# Altium PCB SiLPA.PcbDoc (part 2 of 10)
Units mm, origin at the board's own origin, x right, y up, seen from the top; angles counter-clockwise.
Board outline 222.36 x 100 mm, 4 copper layers (L1, P2, L3, L4), stack 1.598 mm thick; 583 components, 330 nets, 1692 pads, 1781 vias.
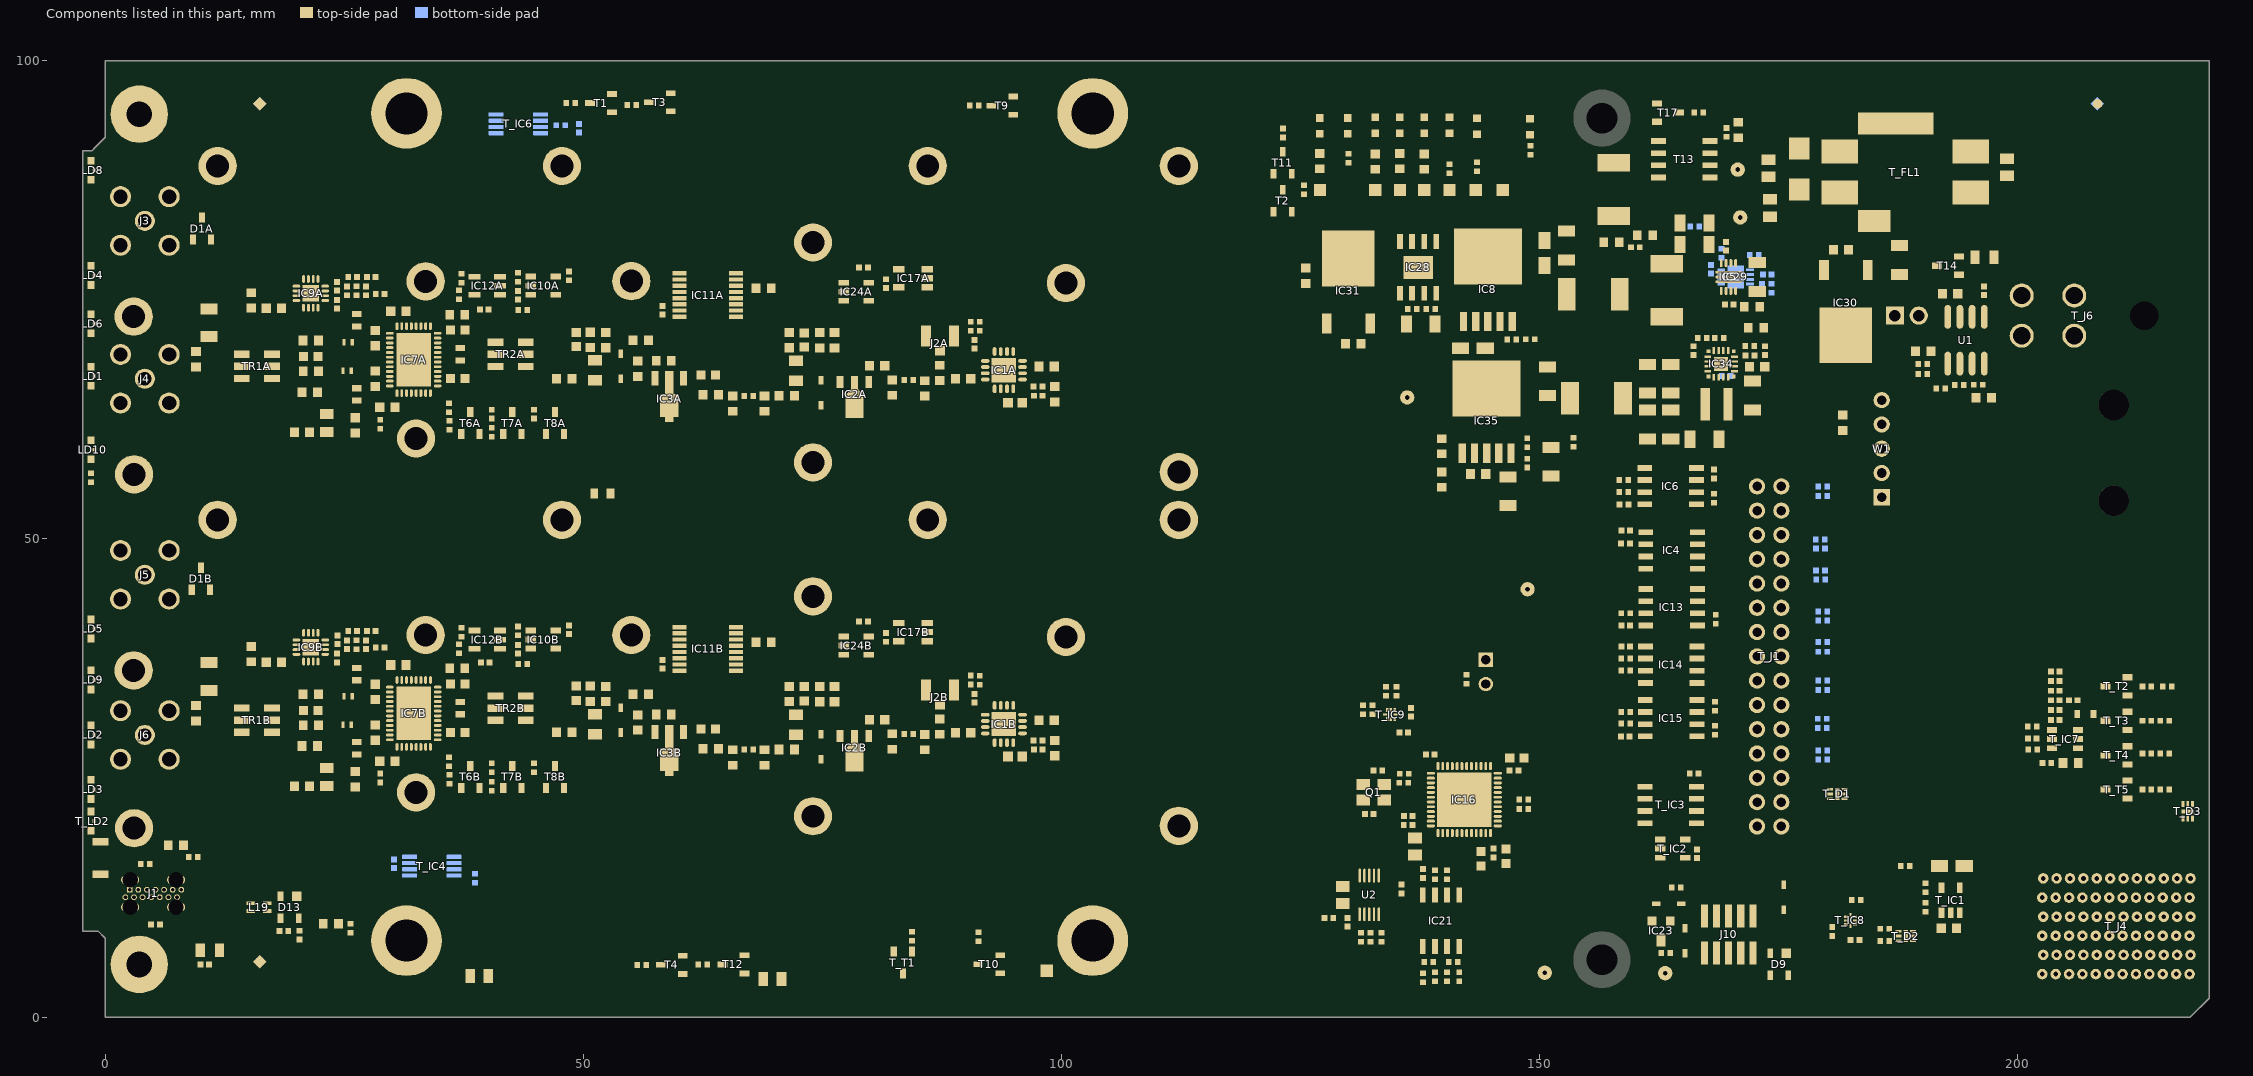
[diagram p4: the components of this part, seen from the top]

## Components (designator, comment, footprint, x,y, rotation, side; value= is the part's Value field where it differs from the comment) (continued)
LD3 "Green" LED_AVAGO_HSME-C120 -1.5,23.8 r90 top locked
LD4 "Green" LED_AVAGO_HSME-C120 -1.5,77.559 r90 top locked
LD5 "Green" LED_AVAGO_HSME-C120 -1.5,40.582 r90 top locked
LD6 "Green" LED_AVAGO_HSME-C120 -1.5,72.5 r90 top locked
LD8 "Red" LED_AVAGO_HSMC-C120 -1.5,88.55 r90 top locked
LD9 "Green" LED_AVAGO_HSME-C120 -1.5,35.25 r90 top locked
LD10 "Red" LED_AVAGO_HSMC-C120 -1.5,59.325 r90 top locked
LD11 "Green" LED_KINGBRIGHT_KPH-1608CGCKr 140.55,93.25 r270 top
LD12 "Green" LED_KINGBRIGHT_KPH-1608CGCKr 137.909,93.25 r270 top
LD13 "Green" LED_KINGBRIGHT_KPH-1608CGCKr 143.432,93.15 r270 top
LD14 "Green" LED_KINGBRIGHT_KPH-1608CGCKr 132.8,93.25 r270 top
LD16 "Green" LED_KINGBRIGHT_KPH-1608CGCKr 127,93.191 r270 top
LD18 "Green" LED_KINGBRIGHT_KPH-1608CGCKr 135.369,93.25 r270 top
Q1 "24MHz" XTAL_EPSON_TSX-3225 132.629,23.5 r270 top
R1A "100" RESC1005X40N 90.5,72.25 r270 top (schematic designator R1)
R1B "100" RESC1005X40N 90.5,35.25 r270 top (schematic designator R1)
R2A "100" RESC1005X40N 91.44,72.24 r270 top (schematic designator R2)
R2B "100" RESC1005X40N 91.44,35.24 r270 top (schematic designator R2)
R3A "1k" RESC1608X55N 58.4,68.64 r180 top (schematic designator R3)
R3B "1k" RESC1608X55N 58.4,31.64 r180 top (schematic designator R3)
R4A "Undefined" RESC1608X55N 87.26,67.37 r270 top (schematic designator R4)
R4B "Undefined" RESC1608X55N 87.26,30.37 r270 top (schematic designator R4)
R5A "0" RESC1005X40N 67.29,64.96 r180 top (schematic designator R5)
R5B "0" RESC1005X40N 67.29,27.96 r180 top (schematic designator R5)
R6A "75" RESC1005X40N 84.01,66.61 r180 top (schematic designator R6)
R6B "75" RESC1005X40N 84.01,29.61 r180 top (schematic designator R6)
R7A "100" RESC1608X55N 85.67,65.75 r90 top (schematic designator R7)
R7B "100" RESC1608X55N 85.67,28.75 r90 top (schematic designator R7)
R8A "100" RESC1608X55N 82.3,65.82 r90 top (schematic designator R8)
R8B "100" RESC1608X55N 82.3,28.82 r90 top (schematic designator R8)
R9A "Undefined" RESC1608X55N 68.93,64.14 r90 top (schematic designator R9)
R9B "Undefined" RESC1608X55N 68.93,27.14 r90 top (schematic designator R9)
R10A "Undefined" RESC1608X55N 65.61,64.14 r90 top (schematic designator R10)
R10B "Undefined" RESC1608X55N 65.61,27.14 r90 top (schematic designator R10)
R11 "330" RESC1005X40N 48.69,95.6 r0 top
R12 "330" RESC1005X40N 55.065,95.36 r0 top
R13 "330" RESC1005X40N 9.2,16.754 r0 top
R14 "330" RESC1005X40N 56.106,5.468 r0 top
R15 "330" RESC1005X40N 62.479,5.508 r0 top
R16 "100" RESC1005X40N 158.959,49.54 r0 top
R17 "47k" RESC1608X55N 172.178,74.3 r0 top
R18A "910" RESC1608X55N 36.806,73.461 r0 top (schematic designator R18)
R18B "910" RESC1608X55N 36.806,36.461 r0 top (schematic designator R18)
R19A "18k" RESC1005X40N 28.75,62 r270 top (schematic designator R19)
R19B "18k" RESC1005X40N 28.75,25 r270 top (schematic designator R19)
R20 "10k" RESC1005X40N 125.361,86.5 r90 top
R21A "Undefined" RESC1608X55N 21.49,67.521 r0 top (schematic designator R21)
R21B "Undefined" RESC1608X55N 21.49,30.521 r0 top (schematic designator R21)
R22 "10k" RESC1005X40N 84.35,8.46 r90 top
R23A "1k" RESC1005X40N 43.16,77.375 r90 top (schematic designator R23)
R23B "1k" RESC1005X40N 43.16,40.375 r90 top (schematic designator R23)
R24A "0" RESC1005X40N 25.852,77.375 r0 top (schematic designator R24)
R24B "0" RESC1005X40N 25.852,40.375 r0 top (schematic designator R24)
R25A "0" RESC1608X55N 68.84,76.2 r0 top (schematic designator R25)
R25B "0" RESC1608X55N 68.84,39.2 r0 top (schematic designator R25)
R26 "100" RESC1005X40N 138.376,5.779 r0 top
R27A "82" RESC1608X55N 15.28,74.95 r270 top (schematic designator R27)
R27B "82" RESC1608X55N 15.28,37.95 r270 top (schematic designator R27)
R28 "56k" RESC1608X55N 161,81.75 r0 top
R29A "2k4" RESC1005X40N 35.946,63.709 r270 top (schematic designator R29)
R29B "2k4" RESC1005X40N 35.946,26.709 r270 top (schematic designator R29)
R30 "8k2" RESC1608X55N 157.5,81 r0 top
R31A "3R9" RESC1005X40N 26.275,75.93 r270 top (schematic designator R31)
R31B "3R9" RESC1005X40N 26.275,38.93 r270 top (schematic designator R31)
R32A "10k" RESC1005X40N 37,75.53 r90 top (schematic designator R32)
R32B "10k" RESC1005X40N 37,38.53 r90 top (schematic designator R32)
R33A "20k" RESC1005X40N 37.25,77.25 r270 top (schematic designator R33)
R33B "20k" RESC1005X40N 37.25,40.25 r270 top (schematic designator R33)
R34 "100" RESC1005X40N 168.193,54.255 r90 top
R35 "100" RESC1005X40N 158.784,54.885 r0 top
R36 "100" RESC1005X40N 168.213,56.788 r90 top
R37 "100" RESC1005X40N 158.784,56.155 r0 top
R38 "100" RESC1005X40N 168.395,41.601 r90 top
R39 "100" RESC1005X40N 158.978,42.227 r0 top
R40 "27k" RESC1005X40N 166.185,82.69 r180 bottom
R41 "0" RESC1005X40N 169.019,79.89 r270 bottom
R42 "100" RESC1005X40N 158.967,37.501 r0 top
R43 "100" RESC1005X40N 158.967,36.231 r0 top
R44 "100" RESC1005X40N 168.313,29.992 r90 top
R45 "100" RESC1005X40N 159,30.696 r0 top
R46 "100" RESC1005X40N 168.313,32.499 r90 top
R47 "100" RESC1005X40N 159,31.899 r0 top
R48 "3k3" RESC1005X40N 172.429,79.68 r180 bottom
R49 "75k" RESC1005X40N 174.229,76.19 r270 bottom
R50 "15k" RESC1005X40N 173.229,76.19 r90 bottom
R51 "100k" RESC1608X55N 170.75,92.75 r270 top
R52A "82" RESC1005X40N 43.63,73.92 r180 top (schematic designator R52)
R52B "82" RESC1005X40N 43.656,36.92 r180 top (schematic designator R52)
R53 "0" RESC1005X40N 131.529,32.125 r270 top
R55 "330" RESC1005X40N -1.475,56.375 r90 top
R56 "100k" RESC1005X40N 190.025,68.275 r180 top
R57 "33k" RESC1005X40N 193.85,66.075 r180 top
R58 "22k" RESC1005X40N 190.03,67.25 r0 top
R59A "1k2" RESC1005X40N 40.41,63.06 r270 top (schematic designator R59)
R59B "1k2" RESC1005X40N 40.41,26.06 r270 top (schematic designator R59)
R60A "82" RESC1005X40N 44.841,63.06 r270 top (schematic designator R60)
R60B "82" RESC1005X40N 44.841,26.06 r270 top (schematic designator R60)
R61 "10k" RESC1005X40N 38.649,14.508 r270 bottom
R62A "10k" RESC1005X40N 35.984,61.875 r90 top (schematic designator R62)
R62B "10k" RESC1005X40N 35.984,24.875 r90 top (schematic designator R62)
R63 "10k" RESC1005X40N 142.336,35.326 r90 top
R64 "330" RESC1005X40N 123.14,92.444 r270 top
R66 "10k" RESC1005X40N 163.152,6.689 r0 top
R68 "18k" RESC1005X40N 195.825,66.125 r180 top
R69 "24k" RESC1608X55N 23.584,9.779 r180 top
R70 "10k" RESC1005X40N 25.654,9.271 r270 top
R71A "10k" RESC1005X40N 40.41,61.16 r90 top (schematic designator R71)
R71B "10k" RESC1005X40N 40.41,24.16 r90 top (schematic designator R71)
R72 "10k" RESC1005X40N 166.612,94.575 r0 top
R73A "1k" RESC3216X65N 10.84,72.603 r270 top (schematic designator R73)
R73B "1k" RESC3216X65N 10.84,35.603 r270 top (schematic designator R73)
R74 "330" RESC1005X40N 90.879,95.3 r0 top
R75 "2k2" RESC1005X40N 148.3,21.767 r180 top
R76 "2k2" RESC1005X40N 148.3,22.742 r180 top
R77 "2k2" RESC1005X40N 135.835,25.443 r0 top
R78 "2k2" RESC1005X40N 135.788,24.505 r0 top
R80 "24k" RESC1005X40N 147.07,70.865 r180 top
R81 "3k9" RESC1005X40N 148.994,70.881 r180 top
R82 "27k" RESC1005X40N 136.639,74.025 r180 top
R83 "3k" RESC1005X40N 138.574,74.042 r180 top
R84 "330" RESC1005X40N 91.3,8.4 r270 top
R91 "4R7" RESC2012X60N 196.5,79.45 r180 top
R92 "10k" RESC1005X40N 133.453,8.367 r270 top
R93 "10k" RESC1005X40N 164.245,13.533 r0 top
R94 "5k1" RESC1005X40N 4.191,16.002 r180 top
R95 "5k1" RESC1005X40N 5.25,9.693 r180 top
R96 "Undefined" RESC1608X55N 172.6,72.1 r180 top
R97 "Undefined" RESC1608X55N 139.724,56.2 r270 top
R98 "24k" RESC1005X40N 166.078,69.7 r270 top
R99 "0.1" RESC1005X40N 153.517,60.103 r90 top
R100 "13k" RESC1005X40N 148.684,57.937 r270 top
R101 "47k" RESC1005X40N 168.75,71 r180 top
R102 "2k" RESC1005X40N 167,71 r180 top
R103 "1k5" RESC1005X40N 148.684,60.05 r270 top
R104 "100k" RESC1005X40N 171.959,70.171 r180 top
R105 "0" RESC1005X40N 191.925,65.75 r0 top
R106 "3k3" RESC1608X55N 137.909,89.452 r90 top
R107 "10k" RESC1005X40N 143.432,88.938 r90 top
R108 "1k" RESC1608X55N 132.8,89.452 r90 top
R109 "10k" RESC1005X40N 131.29,8.367 r270 top
R110 "1k" RESC1608X55N 127,89.5 r90 top
R117 "100" RESC1005X40N 139.035,14.885 r270 top
R118 "100" RESC1005X40N 140.929,5.779 r0 top
R119 "100" RESC1005X40N 140.305,14.885 r270 top
R120 "10k" RESC1005X40N 132.319,8.367 r270 top
R216 "3k3" RESC1608X55N 135.369,89.5 r90 top
R218 "10k" RESC1005X40N 140.55,88.7 r90 top
RT1 "100k" THERMC1608X95N 51.975,54.75 r180 top
S1 "9774140360" 9774140360 31.5,94.5 r0 top
S2 "9774140360" 9774140360 103.25,94.5 r0 top
S3 "9774140360" 9774140360 31.5,8 r0 top
S4 "9774140360" 9774140360 103.25,8 r0 top
SCREW1A "M2x4" BOSSARD_BN5687-3061579_v 74,81 r90 top (schematic designator SCREW1)
SCREW1B "M2x4" BOSSARD_BN5687-3061579_v 74,44 r90 top (schematic designator SCREW1)
SCREW2A "M2x4" BOSSARD_BN5687-3061579_v 86,89 r90 top (schematic designator SCREW2)
SCREW2B "M2x4" BOSSARD_BN5687-3061579_v 86,52 r90 top (schematic designator SCREW2)
SCREW3A "M2x4" BOSSARD_BN5687-3061579_v 47.75,89 r90 top (schematic designator SCREW3)
SCREW3B "M2x4" BOSSARD_BN5687-3061579_v 47.75,52 r90 top (schematic designator SCREW3)
SCREW4A "M2x4" BOSSARD_BN5687-3061579_v 11.75,89 r90 top (schematic designator SCREW4)
SCREW4B "M2x4" BOSSARD_BN5687-3061579_v 11.75,52 r90 top (schematic designator SCREW4)
SCREW5A "M2x4" BOSSARD_BN5687-3061579_v 2.97,73.25 r90 top (schematic designator SCREW5)
SCREW5B "M2x4" BOSSARD_BN5687-3061579_v 2.97,36.25 r90 top (schematic designator SCREW5)
SCREW6A "M2x4" BOSSARD_BN5687-3061579_v 55,76.95 r90 top (schematic designator SCREW6)
SCREW6B "M2x4" BOSSARD_BN5687-3061579_v 55,39.95 r90 top (schematic designator SCREW6)
SCREW7A "M2x4" BOSSARD_BN5687-3061579_v 32.5,60.5 r90 top (schematic designator SCREW7)
SCREW7B "M2x4" BOSSARD_BN5687-3061579_v 32.5,23.5 r90 top (schematic designator SCREW7)
SCREW8A "M2x4" BOSSARD_BN5687-3061579_v 3.01,56.75 r90 top (schematic designator SCREW8)
SCREW8B "M2x4" BOSSARD_BN5687-3061579_v 3.01,19.75 r90 top (schematic designator SCREW8)
SCREW9A "M2x4" BOSSARD_BN5687-3061579_v 33.5,76.933 r90 top locked (schematic designator SCREW9)
SCREW9B "M2x4" BOSSARD_BN5687-3061579_v 33.5,40 r90 top (schematic designator SCREW9)
SCREW10A "M2x4" BOSSARD_BN5687-3061579_v 112.25,57 r90 top (schematic designator SCREW10)
SCREW10B "M2x4" BOSSARD_BN5687-3061579_v 112.25,20 r90 top (schematic designator SCREW10)
SCREW11A "M2x4" BOSSARD_BN5687-3061579_v 112.25,89 r90 top (schematic designator SCREW11)
SCREW11B "M2x4" BOSSARD_BN5687-3061579_v 112.25,52 r90 top (schematic designator SCREW11)
SCREW12A "M2x4" BOSSARD_BN5687-3061579_v 74,58 r90 top (schematic designator SCREW12)
SCREW12B "M2x4" BOSSARD_BN5687-3061579_v 74,21 r90 top (schematic designator SCREW12)
SCREW13A "M2x4" BOSSARD_BN5687-3061579_v 100.45,76.75 r90 top (schematic designator SCREW13)
SCREW13B "M2x4" BOSSARD_BN5687-3061579_v 100.45,39.75 r90 top (schematic designator SCREW13)
SW1 "B3U-3000PM" FP-B3U-3000PM-MFG -0.85,16.62 r90 top locked
T1 "BSH103" SOT95P230X110-3N 51.835,95.57 r180 top
T2 "BSH103" SOT95P230X110-3N 123.116,85.35 r90 top
T3 "BSH103" SOT95P230X110-3N 57.964,95.659 r180 top
T4 "BSH103" SOT95P230X110-3N 59.236,5.468 r180 top
T6A "BSS138LT1G" SOT95P240X110-3N 38.168,62.11 r90 top (schematic designator T6)
T6B "BSS138LT1G" SOT95P240X110-3N 38.168,25.11 r90 top (schematic designator T6)
T7A "BSS138LT1G" SOT95P240X110-3N 42.56,62.11 r90 top (schematic designator T7)
T7B "BSS138LT1G" SOT95P240X110-3N 42.56,25.11 r90 top (schematic designator T7)
T8A "BSS138LT1G" SOT95P240X110-3N 47.027,62.11 r90 top (schematic designator T8)
T8B "BSS138LT1G" SOT95P240X110-3N 47.027,25.11 r90 top (schematic designator T8)
T9 "BSH103" SOT95P230X110-3N 93.791,95.3 r180 top
T10 "BSH103" SOT95P230X110-3N 92.442,5.526 r180 top
T11 "BSH103" SOT95P230X110-3N 123.116,89.336 r90 top
T12 "BSH103" SOT95P230X110-3N 65.688,5.508 r180 top
T13 "SI4425DDY-T1-GE3" SOIC127P600X175-8N 165.1,89.7 r180 top
T14 "BSS138LT1G" SOT95P240X110-3N 192.675,78.575 r180 top
T17 "BSS138LT1G" SOT95P240X110-3N 163.425,94.575 r0 top
T_B1 "Plated Hole" c150h50 170.695,88.615 r90 top
T_B2 "Plated Hole" c150h50 148.717,44.737 r90 top
T_B3 "Plated Hole" c150h50 163.111,4.596 r90 top
T_B4 "Plated Hole" c150h50 150.519,4.641 r90 top
T_B5 "Plated Hole" c150h50 170.963,83.613 r90 top
T_B6 "Plated Hole" c150h50 136.133,64.791 r90 top
T_B7 "Plated Hole" c600h270 3.556,5.512 r0 top
T_B8 "Plated Hole" c600h270 3.556,94.412 r0 top
T_C1 "1uF" CAPC1608X87N 192.781,9.284 r180 top
T_C2 "4.7uF" CAPMP3216X180N 193.081,15.79 r0 top
T_C3 "100nF" CAPC1005X55N 166.424,17.087 r270 top
T_C4 "100nF" CAPC1005X55N 166.132,25.492 r0 top
T_C5 "100nF" CAPC1005X55N 49.552,92.945 r270 bottom
T_C8 "100nF" CAPC1005X55N 30.193,16.043 r90 bottom
T_C9 "10uF" CAPC2012X95N 174.069,84.597 r90 top
T_C10 "10uF" CAPC2012X95N 173.913,88.753 r270 top
T_C11 "10uF" CAPC2012X95N 198.861,88.861 r270 top
T_C12 "22pF" CAPC1005X55N 10.395,5.512 r0 top
T_C13 "10nF" CAPC1005X55N 201.498,29.122 r180 top
T_C14 "100nF" CAPC1005X55N 203.898,33.13 r180 top
T_C15 "100nF" CAPC1005X55N 203.898,32.11 r180 top
T_C16 "10nF" CAPC1005X55N 203.898,31.064 r180 top
T_C17 "10nF" CAPC1005X55N 203.898,36.148 r180 top
T_C18 "10nF" CAPC1005X55N 203.898,34.128 r180 top
T_C19 "10nF" CAPC1005X55N 203.898,35.128 r180 top
T_C20 "100nF" CAPC1005X55N 203.028,26.572 r0 top
T_C21 "100nF" CAPC1005X55N 205.79,33.13 r180 top
T_C22 "100nF" CAPC1005X55N 180.583,8.951 r90 top
T_C23 "100nF" CAPC1005X55N 182.958,8.051 r180 top
T_C24 "100nF" CAPC1005X55N 135.784,29.76 r180 top
T_C25 "100nF" CAPC1005X55N 136.544,31.885 r270 top
T_D1 "UCLAMP3305P.TCT" SON50P160X65_HS-7N 181.1,23.328 r0 top
T_D2 "UCLAMP3305P.TCT" SON50P160X65_HS-7N 188.263,8.478 r180 top
T_D3 "UCLAMP3305P.TCT" SON50P160X65_HS-7N 217.746,21.503 r90 top
T_D5 "SMBJ12A" DIOM5336X265N 177.111,88.678 r90 top
T_D6 "CDBU0520-HF" SOD-523F 207.039,31.689 r180 top
T_FL1 "10A/50VDC" FIL_MURATA_BNX02 188.224,88.325 r180 top
T_IC1 "TPS70933DBV" SOT95P280X145-5N 192.962,12.233 r90 top
T_IC2 "24AA02E48T-I/OT" SOT95P280X145-5N 163.904,17.625 r0 top
T_IC3 "24AA025E48-I/SN" SOIC127P600X175-8N 163.7,22.187 r0 top
T_IC4 "LM75AIMMX/NOPB" DGK0008A_M 34.146,15.779 r180 bottom
T_IC6 "LM75AIMMX/NOPB" DGK0008A_M 43.185,93.401 r0 bottom
T_IC7 "TPS3808G01DBVT" SOT95P280X145-6N 204.903,29.072 r180 top
T_IC8 "FXMA2102UMX" FXMA2102UMX 182.483,10.101 r90 top
T_IC9 "FXMA2102UMX" FXMA2102UMX 134.429,31.635 r180 top
T_J1 "" 3M_N2530-6002RB 173.984,37.718 r270 top locked
T_J4 "P1" AMPHENOL_10052825-101LF 210.289,9.5 r90 top locked
T_J6 "Mini-Fit Jr.™" MOLEX_39-30-0040 203.139,73.35 r270 top locked
T_LD1 "Green" LED_KINGBRIGHT_KPH-1608CGCKr 148.975,93.1 r270 top
T_LD2 "Green" LED_AVAGO_HSME-C120 -1.5,20.5 r90 top locked
T_LD4 "Green" LED_KINGBRIGHT_KPH-1608CGCK 129.916,93.191 r270 top
T_R1 "1k6" RESC1005X40N 149.026,90.65 r270 top
T_R2 "0" RESC1005X40N 188.225,15.79 r180 top
T_R3 "10k" RESC1608X55N 7.375,17.975 r180 top
T_R4 "0" RESC1005X40N 190.334,11.483 r90 top
T_R6 "1k6" RESC1005X40N 129.987,89.818 r270 top
T_R7 "10k" RESC1005X40N 190.334,13.533 r270 top
T_R8 "10k" RESC1608X55N 205.503,26.572 r180 top
T_R13 "22" RESC1005X40N 215.589,34.588 r0 top
T_R14 "22" RESC1005X40N 215.339,30.985 r0 top
T_R15 "22" RESC1005X40N 186.052,9.236 r0 top
T_R16 "22" RESC1005X40N 215.339,27.58 r0 top
T_R17 "22" RESC1005X40N 186.052,7.969 r0 top
T_R18 "22" RESC1005X40N 215.339,23.785 r0 top
T_R19 "200" RESC1005X40N 183.098,12.24 r180 top
T_R25 "0" RESC1005X40N 47.64,93.255 r180 bottom
T_R26 "1M1" RESC2012X60N 10.925,6.975 r0 top
T_R27 "10M" RESC2113X55N 69.76,4 r0 top
T_R28 "10M" RESC2113X55N 39.1,4.28 r180 top
T_R29 "100k" RESC1005X40N 201.536,27.987 r0 top
T_R30 "3k9" RESC1005X40N 201.498,30.372 r0 top
T_R31 "10k" RESC1005X40N 213.489,34.588 r180 top
T_R32 "10k" RESC1005X40N 213.489,30.985 r180 top
T_R33 "10k" RESC1005X40N 213.489,27.58 r180 top
T_R34 "10k" RESC1005X40N 213.489,23.785 r180 top
T_R35 "0" RESC1005X40N 179.6,55.478 r180 bottom
T_R36 "0" RESC1005X40N 179.35,49 r180 bottom
T_R37 "0" RESC1005X40N 179.35,46.7 r180 bottom
T_R38 "0" RESC1005X40N 179.6,41.45 r180 bottom
T_R39 "0" RESC1005X40N 179.57,39.2 r180 bottom
T_R40 "0" RESC1005X40N 179.6,34.22 r180 bottom
T_R41 "0" RESC1005X40N 179.55,31.2 r180 bottom
T_R42 "0" RESC1005X40N 179.6,27.894 r180 bottom
T_R43 "0" RESC1005X40N 139.053,4.234 r90 top
T_R44 "0" RESC1005X40N 140.305,4.234 r90 top
T_R51 "0" RESC1005X40N 179.6,54.47 r180 bottom
T_R52 "0" RESC1005X40N 179.32,49.95 r180 bottom
T_R53 "0" RESC1005X40N 179.356,45.756 r180 bottom
T_R54 "0" RESC1005X40N 179.6,42.43 r180 bottom
T_R55 "0" RESC1005X40N 179.57,38.2 r180 bottom
T_R56 "0" RESC1005X40N 179.6,35.178 r180 bottom
T_R57 "0" RESC1005X40N 179.525,30.22 r180 bottom
T_R58 "0" RESC1005X40N 179.6,26.922 r180 bottom
T_R59 "0" RESC1005X40N 137.775,4.13 r90 top
T_R60 "0" RESC1005X40N 141.575,4.234 r90 top
T_R67 "10k" RESC1005X40N 135.024,34.06 r90 top
T_R68 "10k" RESC1005X40N 133.905,34.069 r90 top
T_R69 "10k" RESC1005X40N 132.483,32.125 r270 top
T_T1 "BSS138LT1G" SOT95P240X110-3N 83.402,5.693 r270 top
T_T2 "BSS138LT1G" SOT95P240X110-3N 210.314,34.588 r180 top
T_T3 "BSS138LT1G" SOT95P240X110-3N 210.314,30.985 r180 top
T_T4 "BSS138LT1G" SOT95P240X110-3N 210.314,27.362 r180 top
T_T5 "BSS138LT1G" SOT95P240X110-3N 210.314,23.795 r180 top
TP1 "Test Point" TPS127 137.909,86.5 r0 top
TP2 "Test Point" TPS127 143.304,86.5 r0 top
TP3 "Test Point" TPS127 132.8,86.5 r0 top
TP5 "Test Point" TPS127 127,86.5 r0 top
TP16 "Test Point" TPS127 135.369,86.5 r270 top
TP18 "Test Point" TPS127 140.55,86.5 r270 top
TP22 "Test Point" TPS127 146.13,86.5 r90 top
TP23 "Test Point" TPS127 98.45,4.84 r90 top
TR1A "TCM1-63AX+" XFMR_TCM1-63AX+ 15.855,68.047 r90 top value=1:1 (schematic designator TR1)
TR1B "TCM1-63AX+" XFMR_TCM1-63AX+ 15.855,31.047 r90 top value=1:1 (schematic designator TR1)
TR2A "TCM1-63AX+" XFMR_TCM1-63AX+ 42.375,69.303 r270 top value=1:1 (schematic designator TR2)
TR2B "TCM1-63AX+" XFMR_TCM1-63AX+ 42.375,32.303 r270 top value=1:1 (schematic designator TR2)
U1 "TC649EOA" SOIC-OA8_M 194.565,70.775 r90 top
U2 "MCP4728A1-E/UN" MSOP-UN10_L 132.163,12.775 r90 top
W1 "Header 5" SAMTEC_HTSW-105-23-L-S 185.75,54.355 r90 top
WASHER2 "D11.1xd6.6" Keystone_7687 -17.8,83.25 r180 top
WASHER4 "D11.1xd6.6" Keystone_7687 -17.55,29.924 r180 top
WASHER6 "D11.1xd6.6" Keystone_7687 -16.75,46.25 r180 top
WASHER8 "D11.1xd6.6" Keystone_7687 -17,66.597 r180 top

## Footprints (in the part's own frame and the unit in brackets; to place one, negate y for a bottom-side part, rotate by r counter-clockwise, add the part's x,y. Pads: shape width x height; smd on the part's side, far side on the other; paste and mask are expansions set on the pad)
3M_N2530-6002RB [mm] "30 Contacts - Straight .100\" x .100\" Low Profile Four-Wall Header"
  round 1.7 hole 1: 1(-17.78,-1.27) 2(-17.78,1.27) 3(-15.24,-1.27) 4(-15.24,1.27) 5(-12.7,-1.27) 6(-12.7,1.27) 7(-10.16,-1.27) 8(-10.16,1.27) 9(-7.62,-1.27) 10(-7.62,1.27) 11(-5.08,-1.27) 12(-5.08,1.27) 13(-2.54,-1.27) 14(-2.54,1.27) 15(0,-1.27) 16(0,1.27) 17(2.54,-1.27) 18(2.54,1.27) 19(5.08,-1.27) 20(5.08,1.27) 21(7.62,-1.27) 22(7.62,1.27) 23(10.16,-1.27) 24(10.16,1.27) 25(12.7,-1.27) 26(12.7,1.27) 27(15.24,-1.27) 28(15.24,1.27) 29(17.78,-1.27) 30(17.78,1.27)
  silkscreen extent -22.71,-4.85 22.71,4.52, body extent -22.71,-4.11 22.71,4.52, height 9.91
0603AF681XJRW [mm]
  rect 0.64x1.02 smd: 1(-0.64,0) 2(0.64,0)
  silkscreen extent -1.5,-0.05 -1.4,0.05, body extent -0.9,-0.56 0.9,0.56, height 1.01
9774140360 [mm] "SMD Steel Spacer with internal Thread"
  round 7.4 smd paste-576.133: 1(0,0)
  round 0 hole 4.4 unplated: ""(0,0)
  body extent -3.03,-2.94 2.95,3.04, height 14
ADL2012S1R2MT01 [mm]
  rect 1.1x1.5 smd: 1(-1.05,0) 2(1.05,0)
  silkscreen extent -2.2,-0.05 -2.1,0.05, body extent -1.1,-0.79 1.1,0.88, height 0.62
AMPHENOL_10052825-101LF [mm]
  round 1.1 hole 0.5: A1(-5,-7.65) A2(-3,-7.75) A3(-1,-7.65) A4(1,-7.75) A5(3,-7.65) A6(5,-7.75) B1(-5,-6.25) B2(-3,-6.35) B3(-1,-6.25) B4(1,-6.35) B5(3,-6.25) B6(5,-6.35) C1(-5,-4.85) C2(-3,-4.95) C3(-1,-4.85) C4(1,-4.95) C5(3,-4.85) C6(5,-4.95) D1(-5,-3.45) D2(-3,-3.55) D3(-1,-3.45) D4(1,-3.55) D5(3,-3.45) D6(5,-3.55) E1(-5,-2.05) E2(-3,-2.15) E3(-1,-2.05) E4(1,-2.15) E5(3,-2.05) E6(5,-2.15) F1(-5,-0.65) F2(-3,-0.75) F3(-1,-0.65) F4(1,-0.75) F5(3,-0.65) F6(5,-0.75) G1(-5,0.75) G2(-3,0.65) G3(-1,0.75) G4(1,0.65) G5(3,0.75) G6(5,0.65) H1(-5,2.15) H2(-3,2.05) H3(-1,2.15) H4(1,2.05) H5(3,2.15) H6(5,2.05) I1(-5,3.55) I2(-3,3.45) I3(-1,3.55) I4(1,3.45) I5(3,3.55) I6(5,3.45) J1(-5,4.95) J2(-3,4.85) J3(-1,4.95) J4(1,4.85) J5(3,4.95) J6(5,4.85) K1(-5,6.35) K2(-3,6.25) K3(-1,6.35) K4(1,6.25) K5(3,6.35) K6(5,6.25) L1(-5,7.75) L2(-3,7.65) L3(-1,7.75) L4(1,7.65) L5(3,7.75) L6(5,7.65)
  silkscreen extent -6.95,-21.95 6.95,11.85, body extent -6.95,-21.95 6.95,11.85, height 15.25
"ANALOG-DEVICES_LQFN(16) # 05-08-1798" [mm] "LQFN, 16-Lead, 0.50mm Pitch; 3.50mm W X 3.50mm L X 0.83mm H body (with 4 Tab 0.375 X0.375mm and with a Thermal Tab 1.43 X1.43mm)# 05-08-1798"
  rect 0.7x0.25 smd: 1(-1.4,0.75) 2(-1.4,0.25) 3(-1.4,-0.25) 4(-1.4,-0.75) 9(1.4,-0.75) 10(1.4,-0.25) 11(1.4,0.25) 12(1.4,0.75)
  rect 0.25x0.7 smd: 5(-0.75,-1.4) 6(-0.25,-1.4) 7(0.25,-1.4) 8(0.75,-1.4) 13(0.75,1.4) 14(0.25,1.4) 15(-0.25,1.4) 16(-0.75,1.4)
  rect 1.43x1.43 smd: 17(0,0)
  rect 0.375x0.375 smd: 18(-1.312,-1.312) 19(1.312,-1.312) 20(1.312,1.312) 21(-1.312,1.312)
  silkscreen extent -2.4,0.78 -2.2,0.97, body extent -1.5,-1.5 1.5,1.5, height 1.05
ANALOG-DEVICES_SOT-89(RK-3) [mm] "SOT89, 1.50mm Pitch; 3-Leads, 2.5mm W X 4.5mm L X 1.6mm H body"
  rect 1.25x0.7 smd: 1(-1.89,1.5) 3(-1.89,-1.5)
  rect 1.35x0.7 smd: 2(-1.84,0)
  rect 0.131x0.131 smd: 2(-0.968,-0.491) 2(-0.968,0.49) 2(-0.706,0.753) 2(-0.706,-0.753)
  rect 0.262x0.262 smd: 2(-0.771,0.556) 2(-0.771,-0.556)
  rect 3x0.85 smd: 2(0.335,0)
  rect 2.475x0.525 smd: 2(0.597,0.687) 2(0.597,-0.688)
  L1 region: -1.165,0.425 -0.64,0.95 -0.64,-0.95 -1.165,-0.425
  silkscreen extent -2.22,-2.25 1.24,2.58, body extent -2.44,-2.25 1.81,2.25, height 1.6
BOSSARD_BN5687-3061579_v [mm] "M2 L=4mm Hexalobular Socket Pan Head Screw, Fully Threaded - Stainless Steel A2"
  silkscreen extent -2.85,-2.85 2.85,2.85, body extent -2,-2 2,2, height 1.6
c150h50 [mm] "Plated Through Hole: Hole Dia.=0.5mm Pad Dia.=1.5mm"
  round 1.5 hole 0.5: 1(0,0)
  silkscreen extent -1.1,-1.1 1.1,1.1
c600h270 [mm] "Plated Through Hole: Hole Dia.=2.7mm Pad Dia.=6.0mm"
  round 6 / inner round 4 / far side round 6 hole 2.7: 1(0,0)
CAPC1005X55N [mm] "Capacitor, Non-Polarized, Chip; 1.00mm L X 0.50mm W X 0.70mm H, IPC Medium Density"
  rect 0.62x0.62 smd: 1(-0.45,0) 2(0.45,0)
  body extent -0.52,-0.27 0.53,0.28, height 0.55
CAPC1608X80N [mm] "Chip Capacitor, Body 1.6x0.8mm IPC Medium Density"
  rect 1x1 smd: 1(-0.75,0) 2(0.75,0)
  body extent -0.87,-0.47 0.88,0.48, height 0.8
CAPC1608X87N [mm] "Chip Capacitor, Body 1.6x0.8mm IPC Medium Density"
  rect 0.95x1 smd: 1(-0.8,0) 2(0.8,0)
  body extent -0.87,-0.47 0.88,0.48, height 0.87
CAPC1608X90N [mm] "Chip Capacitor, Body 1.6x0.8mm IPC Medium Density"
  rect 0.95x0.95 smd: 1(-0.75,0) 2(0.75,0)
  body extent -0.85,-0.45 0.85,0.45, height 0.9
CAPC1709X95N [mm] "Capacitor, non-Polarized, Chip; 1.65mm L X 0.85mm W X 0.95mm H,IPC Medium Density"
  rect 0.95x1 smd: 1(-0.75,0) 2(0.75,0)
  body extent -0.87,-0.47 0.88,0.48, height 0.95
CAPC2012X95N [mm] "Chip Capacitor, Body 2.0x1.25mm, IPC Medium Density"
  rect 1.1x1.45 smd: 1(-0.9,0) 2(0.9,0)
  silkscreen extent 0,-0.57 0,0.57, body extent -1.05,-0.67 1.05,0.68, height 0.95
CAPC2012X110N [mm] "Chip Capacitor, Body 2.0x1.25mm, IPC Medium Density"
  rect 1.15x1.45 smd: 1(-0.9,0) 2(0.9,0)
  silkscreen extent 0,-0.58 0,0.58, body extent -1.05,-0.67 1.05,0.68, height 1.1
CAPC3216X180N [mm] "Chip Capacitor, Body 3.2x1.6mm, IPC Medium Density"
  rect 1.15x1.8 smd: 1(-1.5,0) 2(1.5,0)
  silkscreen extent -0.55,-0.8 0.55,0.8, body extent -1.7,-0.9 1.7,0.9, height 1.8
CAPMP3216X180N [mm] "Capacitor, Polarized, Molded  Body 3.2x1.6mm, IPC Medium Density"
  rect 1.8x1.25 smd: 1(-1.3,0) 2(1.3,0)
  silkscreen extent -2.4,-0.7 0,1.25, body extent -1.7,-0.9 1.7,0.9, height 1.6
DELOCK_65848 [mm]
  round 2.1 hole 1.4: 1(0,0)
  round 2.2 hole 1.5: 2(-2.54,2.54) 2(-2.54,-2.54) 2(2.54,2.54) 2(2.54,-2.54)
  silkscreen extent -3,-5.1 19.1,5.1, body extent -3.04,-3.17 18.96,3.09, height 9.15
DGK0008A_M [mm] "TSOP, 8-Leads, Body 3.1x3.1mm, Pitch 0.65mm, IPC Low Density"
  rrect22% 1.55x0.45 smd: 1(-2.325,0.975) 2(-2.325,0.325) 3(-2.325,-0.325) 4(-2.325,-0.975) 5(2.325,-0.975) 6(2.325,-0.325) 7(2.325,0.325) 8(2.325,0.975)
  silkscreen extent -2.45,-1.55 1.15,1.92, body extent -2.45,-1.5 2.45,1.5, height 0.94
DIOM5336X265N [mm] "DO-214-AA/SMB Diode, Molded Body; 5.34mm L X 3.625mm W X 2.65mm H, IPC Medium Density"
  rect 2.3x2.15 smd: 1(-2.15,0) 2(2.15,0)
  silkscreen extent -3.92,-1.8 2.65,1.8, body extent -2.7,-1.95 2.7,1.95, height 2.4
FIDUCIAL_TOP_C100-200#1 [mm] "Round Fiducial Target, Top Layer, 1.0mm, Top Solder 2.0mm, Keepout =2.0mm"
  round 1 smd paste-0.51 mask+0.5: FTG2(0,0)
  L1 keep-out circle w0.1: c0,0 r1
FIDUCIAL_TOP_C100-200#2 [mm] "Round Fiducial Target, Top Layer, 1.0mm, Top Solder 2.0mm, Keepout =2.0mm"
  round 1 smd paste-0.51 mask+0.5: 1(0,0)
  L1 keep-out circle w0.1: c0,0 r1
FIDUCIAL_TOP_S100-200 [mm] "Square Fiducial Target, Top Layer, 1.0mm, Top Solder 2.0mm, Keepout =2.0mm"
  rect 1x1 smd rot 45 paste-0.51 mask+0.5: 1(0,0)
  L1 keep-out region: 1.414,0 0,-1.414 -1.414,0 0,1.414
FIL_MURATA_BNX02 [mm] "Block Type EMIFIL LC Combined Type, BNX02* Series"
  rect 3.8x2.5 smd: 1(-6.85,2.1) 2(6.85,2.1) 3(-6.85,-2.2) 4(6.85,-2.2)
  rect 7.9x2.3 smd: 4(1,-5.1)
  rect 3.4x2.3 smd: 4(3.25,5.1)
  silkscreen extent -5.95,-4.45 7.77,5.05, body extent -6.05,-4.55 6.05,4.55, height 3.1
FP-2169890001-MFG [mm]
  rrect100% 0.9x1.9 hole 1.6 slot 0.6 at 0 deg paste-2539.97 mask+0: 1(-1.43,5.575) 2(1.43,5.575) 3(-1.43,0.775) 4(1.43,0.775)
  rect 0.6x0.6 hole 0.4 paste-2539.97 mask+0: A1(-0.39,0.725)
  round 0.6 hole 0.4 paste-2539.97 mask+0: A4(-0.39,1.625) A5(-0.39,2.525) A6(-0.39,3.425) A7(-0.39,4.325) A9(-0.39,5.225) A12(-0.39,6.125) B1(0.39,5.675) B4(0.39,4.775) B5(0.39,3.875) B6(0.39,2.975) B7(0.39,2.075) B9(0.39,1.175) B12(0.39,0.275)
  silkscreen extent -2.65,0.5 1.98,7.42, body extent -2.08,-7.52 2.08,7.52, height 0.25
FP-B3U-3000PM-MFG [mm]
  rect 0.8x1.7 smd paste+0 mask+0: 1(-1.7,-0.35) 2(1.7,-0.35)
  silkscreen extent -1.6,-1.7 1.6,1.7, body extent -2.2,-1.8 2.2,1.8, height 0.25
FXMA2102UMX [mm]
  rect 0.55x0.25 smd: 1(-0.53,0)
  rect 0.25x0.45 smd: 2(-0.4,-0.475) 3(0,-0.475) 4(0.4,-0.475) 6(0.4,0.475) 7(0,0.475) 8(-0.4,0.475)
  rect 0.45x0.25 smd: 5(0.58,0)
  silkscreen extent -1.1,-0.05 -1,0.05, body extent -0.71,-0.61 0.71,0.61, height 0.5
HARWIN_M50-3600542 [mm] "10 Contacts - Pitch 1.27mm - Dual Row SMT Vertical Pin Header"
  rect 0.74x2.4 smd: 1(-2.54,-1.95) 2(-2.54,1.95) 3(-1.27,-1.95) 4(-1.27,1.95) 5(0,-1.95) 6(0,1.95) 7(1.27,-1.95) 8(1.27,1.95) 9(2.54,-1.95) 10(2.54,1.95)
  silkscreen extent -3.17,-3.9 3.18,0.4, body extent -3.17,-2.81 3.17,2.69, height 4.69
HIROSE_U.FL-R-SMT-1(10) [mm] "Up to 6GHz Ultra Small Surface Mount Male Coaxial Connectors U.FL Series"
  rect 1x1.05 smd: 1(0,-1.525)
  rect 1.05x2.2 smd: 2(-1.475,0) 2(1.475,0)
  L1 keep-out lines w0.1: -0.6,-0.65 -0.6,0 cw(c0,0) 0.6,0 0.6,-0.65 -0.6,-0.65
  silkscreen extent -0.7,-0.69 0.7,1.55, body extent -1.5,-1.55 1.5,1.55, height 1.25
IND_COILCRAFT_XAL4030 [mm] "SMD Inductor, Width 4.3mm X Lenght 4.3mm X Height 3.1mm Body, XAL4030 Series"
  rect 0.98x3.4 smd: 1(-1.185,0) 2(1.185,0)
  silkscreen extent -2.15,-2.15 2.15,2.15, body extent -2.15,-2.15 2.15,2.15, height 3.1
IND_MURATA_DLW21S [mm] "Common Mode Choke Coil, DLW21S Series - Body 2 x 1.2mm"
  rect 0.9x0.4 smd: 1(-0.85,-0.4) 2(0.85,-0.4) 3(0.85,0.4) 4(-0.85,0.4)
  silkscreen extent -1.92,-0.6 0,0.6, body extent -1,-0.6 1,0.6, height 1.4
IND_TDK_SPM6530 [mm] "SMD Inductor, 7.1mm L X 6.5mm W X 3mm H, TDK SPM6530 Series"
  rect 1.85x3.4 smd: 1(-2.775,0) 2(2.775,0)
  silkscreen extent -3.5,-3.2 3.5,3.2, body extent -3.6,-3.2 3.6,3.2, height 3.1
INDC1005X55N [mm] "Chip Inductor, 2-Leads, EIA 0402, Metric 1005, Body 1x0.5mm, 0402IPC Medium Density"
  rect 0.6x0.62 smd: 1(-0.46,0) 2(0.46,0)
  body extent -0.52,-0.27 0.53,0.28, height 0.55
INDC1608X75N [mm] "Chip Inductor, 2-Leads, EIA 0603, Metric 1608, Body 1.6x0.8mm, IPC Medium Density"
  rect 0.9x1 smd: 1(-0.8,0) 2(0.8,0)
  body extent -0.87,-0.47 0.88,0.48, height 0.7
INDC1608X95N [mm] "Chip Inductor, 2-Leads, EIA 0603, Metric 1608, Body 1.6x0.8mm, IPC Medium Density"
  rect 0.95x1 smd: 1(-0.8,0) 2(0.8,0)
  body extent -0.87,-0.47 0.88,0.48, height 0.95
INDC2012X110N [mm] "Chip Inductor, EIA 0805, Metric 2012, Body 2.0x1.2mm, IPC Medium Density"
  rect 1.05x1.4 smd: 1(-0.95,0) 2(0.95,0)
  silkscreen extent 0,-0.53 0,0.53, body extent -1,-0.62 1,0.63, height 1.1
Jumper [mm]
  rect 1.5x1.5 hole 0.965: 1(0,0)
  round 1.5 hole 0.965: 2(0,-2.54)
  silkscreen extent -1.2,-3.81 1.2,1.27, body extent -1.26,-3.84 1.19,1.24, height 8
Keystone_7687 [mm] "Polyphenylene Sulfide PPS Shoulder Washer"
  silkscreen extent -0.8,-5.6 0.8,5.6
LED_AVAGO_HSMC-C120 [mm] "Red Chip LED, 2-Leads, Body 1.7x1.1mm, Side Emitting Package"
  rect 0.8x0.7 smd: 1(-1,0) 2(1,0)
  rect 0.4x0.4 smd: 3(0,-0.35)
  silkscreen extent -1.12,-0.92 0.42,0.8, body extent -0.85,-0.3 0.85,0.8, height 0.7
LED_AVAGO_HSME-C120 [mm] "Green Chip LED, 2-Leads, Body 1.7x1.1mm, Side Emitting Package"
  rect 0.8x0.7 smd: 1(-1,0) 2(1,0)
  rect 0.4x0.4 smd: 3(0,-0.35)
  silkscreen extent -1.12,-0.92 0.42,0.8, body extent -0.85,-0.3 0.85,0.8, height 0.7
LED_KINGBRIGHT_KPH-1608CGCK [mm] "SMT Green LED, Case 0603, Body L 1.6 x W 0.8mm H 0.65mm"
  rect 0.8x0.8 smd: 1(-0.825,0) 2(0.825,0)
  silkscreen extent -1.82,-0.4 0.08,0.4, body extent -0.8,-0.4 0.8,0.4, height 0.65
LED_KINGBRIGHT_KPH-1608CGCKr [mm] "SMT Green LED, Case 0603, Body L 1.6 x W 0.8mm H 0.65mm"
  rect 0.8x0.8 smd: 1(-0.825,0) 2(0.825,0)
  silkscreen extent -1.82,-0.4 0.08,0.4, body extent -0.8,-0.4 0.8,0.4, height 0.65
LQG15WH0N7B02D [mm]
  rect 0.35x0.65 smd: 1(-0.425,0) 2(0.425,0)
  silkscreen extent 0,-0.25 0,0.25, body extent -0.5,-0.25 0.5,0.25, height 0.55
MINI-CIRCUITS_DF782 [mm] "MINI-CIRCUITS DF782 Case, 1.50mm pitch; 4 pin, 2.44mm W X 4.49mm L"
  rect 0.71x1.5 smd: 1(-1.5,-1.915) 3(1.5,-1.915)
  rect 0.917x2.41 smd: 2(0,-1.46)
  rect 0.92x0.493 smd: 4(0,2.418)
  rect 1.905x2.427 smd: 4(0,0.958)
  L1 region: -0.457,-0.751 -0.953,-0.255 -0.953,2.172 -0.46,2.665 0.46,2.665 0.953,2.172 0.953,-0.255 0.457,-0.751 0.457,-2.665 -0.457,-2.665
  silkscreen extent -2.3,-1.3 2.3,1.3, body extent -2.3,-2.12 2.3,2.12, height 1.6
MOLEX_22-04-1021 [mm] "2.5mm (.100\") Pitch KK® Header, Single Row, Vertical, 2 Circuits"
  rect 1.9x1.9 hole 1.2: 1(-1.25,0)
  round 1.9 hole 1.2: 2(1.25,0)
  silkscreen extent -2.25,-2.6 2.25,3.2, body extent -2.25,-2.6 2.25,3.2, height 11.7
MOLEX_39-30-0040 [mm] "4.20mm (.165\") Pitch Mini-Fit Jr. Header, Dual Row, Right Angle with Snap-in Plastic Peg PCB Lock, 4 Circuits"
  round 2.5 hole 1.8: 1(-2.1,2.75) 2(2.1,2.75) 3(-2.1,-2.75) 4(2.1,-2.75)
  round 1 hole 3 unplated mask+1: 5(0,10.05)
  silkscreen extent -5.2,-1.24 4.8,16.65, body extent -5.2,-3.28 4.8,16.65, height 11.4
MSOP-UN10_L [mm] "TSSOP, 10-Leads, Body 3x3mm, Pitch 0.5mm, IPC High Density"
  oval 1.45x0.25 smd: 1(-2.025,1) 2(-2.025,0.5) 3(-2.025,0) 4(-2.025,-0.5) 5(-2.025,-1) 6(2.025,-1) 7(2.025,-0.5) 8(2.025,0) 9(2.025,0.5) 10(2.025,1)
  silkscreen extent -2.15,-1.55 0.9,1.8, body extent -1.55,-1.55 1.55,1.55, height 1.1
MTG240_400#1 [mm] "Plated Through Hole: Hole Dia.=2.4mm Pad Dia.=4.0mm"
  round 4 hole 2.4: 1(0,0)
MTG240_400#2 [mm] "Plated Through Hole: Hole Dia.=2.4mm Pad Dia.=4.0mm"
  round 4 / inner round 3.5 / far side round 4 hole 2.4: 1(0,0)
QFN50P300X300X80-17N-S175 [mm] "QFN, 0.50mm Pitch, Square; 16 Pin, 3.00mm L X 3.00mm W X 0.80mm H Body (w/Thermal Tab 1.75 X 1.75mm),  IPC Medium Density"
  oval 0.8x0.3 smd: 1(-1.5,0.75) 2(-1.5,0.25) 3(-1.5,-0.25) 4(-1.5,-0.75) 9(1.5,-0.75) 10(1.5,-0.25) 11(1.5,0.25) 12(1.5,0.75)
  oval 0.3x0.8 smd: 5(-0.75,-1.5) 6(-0.25,-1.5) 7(0.25,-1.5) 8(0.75,-1.5) 13(0.75,1.5) 14(0.25,1.5) 15(-0.25,1.5) 16(-0.75,1.5)
  rect 1.75x1.75 smd: 17(0,0)
  silkscreen extent -2.62,-1.5 1.5,1.5, body extent -1.57,-1.57 1.58,1.58, height 0.8
QFN50P500X700X80-41N-R360X560 [mm] "QFN, 0.50mm Pitch, Rect., 8 pin X 12 pin, 5.00mm L X 7.00mm W X 0.80mm H body (w/Thermal Tab 3.60 X 5.60mm), IPC Medium Density"
  oval 0.8x0.3 smd: 1(-2.5,2.75) 2(-2.5,2.25) 3(-2.5,1.75) 4(-2.5,1.25) 5(-2.5,0.75) 6(-2.5,0.25) 7(-2.5,-0.25) 8(-2.5,-0.75) 9(-2.5,-1.25) 10(-2.5,-1.75) 11(-2.5,-2.25) 12(-2.5,-2.75) 21(2.5,-2.75) 22(2.5,-2.25) 23(2.5,-1.75) 24(2.5,-1.25) 25(2.5,-0.75) 26(2.5,-0.25) 27(2.5,0.25) 28(2.5,0.75) 29(2.5,1.25) 30(2.5,1.75) 31(2.5,2.25) 32(2.5,2.75)
  oval 0.3x0.8 smd: 13(-1.75,-3.5) 14(-1.25,-3.5) 15(-0.75,-3.5) 16(-0.25,-3.5) 17(0.25,-3.5) 18(0.75,-3.5) 19(1.25,-3.5) 20(1.75,-3.5) 33(1.75,3.5) 34(1.25,3.5) 35(0.75,3.5) 36(0.25,3.5) 37(-0.25,3.5) 38(-0.75,3.5) 39(-1.25,3.5) 40(-1.75,3.5)
  rect 3.6x5.6 smd: 41(0,0)
  silkscreen extent -3.63,-3.5 2.5,3.5, body extent -2.5,-3.5 2.5,3.5, height 0.8
QFN50P700X700X60-49N-S570 [mm] "QFN, 0.50mm Pitch, Square; 48 Pin, 7.00mm L X 7.00mm W X 0.6mm H body (W/Thermal Tab 5.7mm X 5.7mm), IPC Medium Density"
  oval 0.85x0.3 smd: 1(-3.5,2.75) 2(-3.5,2.25) 3(-3.5,1.75) 4(-3.5,1.25) 5(-3.5,0.75) 6(-3.5,0.25) 7(-3.5,-0.25) 8(-3.5,-0.75) 9(-3.5,-1.25) 10(-3.5,-1.75) 11(-3.5,-2.25) 12(-3.5,-2.75) 25(3.5,-2.75) 26(3.5,-2.25) 27(3.5,-1.75) 28(3.5,-1.25) 29(3.5,-0.75) 30(3.5,-0.25) 31(3.5,0.25) 32(3.5,0.75) 33(3.5,1.25) 34(3.5,1.75) 35(3.5,2.25) 36(3.5,2.75)
  oval 0.3x0.85 smd: 13(-2.75,-3.5) 14(-2.25,-3.5) 15(-1.75,-3.5) 16(-1.25,-3.5) 17(-0.75,-3.5) 18(-0.25,-3.5) 19(0.25,-3.5) 20(0.75,-3.5) 21(1.25,-3.5) 22(1.75,-3.5) 23(2.25,-3.5) 24(2.75,-3.5) 37(2.75,3.5) 38(2.25,3.5) 39(1.75,3.5) 40(1.25,3.5) 41(0.75,3.5) 42(0.25,3.5) 43(-0.25,3.5) 44(-0.75,3.5) 45(-1.25,3.5) 46(-1.75,3.5) 47(-2.25,3.5) 48(-2.75,3.5)
  rect 5.7x5.7 smd: 49(0,0)
  silkscreen extent -4.62,-3.5 3.5,3.5, body extent -3.5,-3.5 3.5,3.5, height 0.6
QFN65P400X400X100-17N-S255 [mm] "QFN, 0.65mm pitch,square; 4 pin X 4 pin, 4mm X 4mm X 1mm H body (w/thermal tab 2.55 X 2.55mm),  IPC Medium Density"
  oval 0.9x0.4 smd: 1(-1.95,0.975) 2(-1.95,0.325) 3(-1.95,-0.325) 4(-1.95,-0.975) 9(1.95,-0.975) 10(1.95,-0.325) 11(1.95,0.325) 12(1.95,0.975)
  oval 0.4x0.9 smd: 5(-0.975,-1.95) 6(-0.325,-1.95) 7(0.325,-1.95) 8(0.975,-1.95) 13(0.975,1.95) 14(0.325,1.95) 15(-0.325,1.95) 16(-0.975,1.95)
  rect 2.55x2.55 smd: 17(0,0)
  silkscreen extent -3.13,-2 2,2, body extent -2,-2 2,2, height 1
RESC1005X40N [mm] "Chip Resistor, EIA 0402, Metric 1005, Body 1.0x0.5mm, IPC Medium Density"
  rect 0.58x0.62 smd: 1(-0.47,0) 2(0.47,0)
  body extent -0.52,-0.27 0.53,0.28, height 0.4
RESC1608X55N [mm] "Chip Resistor, EIA 0603, Metric 1608, Body 1.6x0.8mm, IPC Medium Density"
  rect 0.9x1 smd: 1(-0.8,0) 2(0.8,0)
  body extent -0.87,-0.47 0.88,0.48, height 0.55
RESC2012X60N [mm] "Chip Resistor, EIA 0805, Metric 2012, Body 2.0x1.2mm, IPC Medium Density"
  rect 0.95x1.4 smd: 1(-1,0) 2(1,0)
  silkscreen extent 0,-0.55 0,0.55, body extent -1.1,-0.67 1.1,0.68, height 0.6
RESC2113X55N [mm] "Chip Resistor, EIA 0805, Metric 2113, Body 2.05x1.3mm, IPC Medium Density"
  rect 1x1.45 smd: 1(-0.95,0) 2(0.95,0)
  silkscreen extent 0,-0.55 0,0.55, body extent -1,-0.62 1,0.63, height 0.55
RESC3216X65N [mm] "Chip Resistor, EIA 1206, Metric 3216, Body 3.2x1.6mm, IPC Medium Density"
  rect 1.15x1.8 smd: 1(-1.45,0) 2(1.45,0)
  silkscreen extent -0.5,-0.9 0.5,0.9, body extent -1.67,-0.87 1.68,0.88, height 0.65
SAMTEC_HTSW-105-23-L-S [mm] "5 Contacts - Pitch 2.54mm - Single Row  Through Mount Straigh Header (Post Lead 5.84mm, Tail Lead 2.92mm, Insulator 2.54mm)"
  rect 1.7x1.7 hole 1: 1(0,0)
  round 1.7 hole 1: 2(2.54,0) 3(5.08,0) 4(7.62,0) 5(10.16,0)
  silkscreen extent -1.27,-1.27 11.43,1.93, body extent -1.27,-1.27 11.43,1.27, height 8.38
SN74LVC1G08DBVR [mm]
  rect 1.2x0.65 smd paste+0 mask+0.051: 1(-1.475,0.95) 2(-1.475,0) 3(-1.475,-0.95) 4(1.475,-0.95) 5(1.475,0.95)
  silkscreen extent -1.63,-1.55 0.38,1.55, body extent -1.4,-1.45 1.4,1.45, height 1.2
SOD2512X110N [mm] "Small Outline Diode (SOD-323), 1.70mm W X 1.25mm L X 1.10mm H body,  IPC Medium Density"
  rect 0.9x0.5 smd: 1(-1.3,0) 2(1.3,0)
  silkscreen extent -1.62,-0.65 0.85,0.88, body extent -1.35,-0.67 1.35,0.68, height 1.1
SOD2513X114N [mm] "SOD-323 Diode; 1.75mm W X 1.30mm L X 1.14mm H Body, IPC Medium Density"
  rect 0.9x0.5 smd: 1(-1.3,0) 2(1.3,0)
  silkscreen extent -1.45,-0.72 0.95,0.82, body extent -1.4,-0.72 1.4,0.73, height 1.15
SOD-523F [mm] "Small Outline Diode Flat Lead (SOD-523F), Body; 1.80mm L X 1mm W X 0.85mm H"
  rect 0.6x0.8 smd: 1(-0.85,0) 2(0.85,0)
  silkscreen extent -1.88,-0.5 0.2,0.52, body extent -0.91,-0.5 0.89,0.5, height 0.85
SOIC127P600X170-9N-R240X310 [mm] "SOIC, 1.27mm Pitch, 8 Pin, 3.90mm W X 4.90mm L X 1.70mm H body (w/Thermal Tab 2.40 X 3.10mm), IPC Medium Density"
  rect 1.55x0.6 smd: 1(-2.7,1.905) 2(-2.7,0.635) 3(-2.7,-0.635) 4(-2.7,-1.905) 5(2.7,-1.905) 6(2.7,-0.635) 7(2.7,0.635) 8(2.7,1.905)
  rect 2.4x3.1 smd: 9(0,0)
  silkscreen extent -3.32,-2.45 1.55,2.88, body extent -3.1,-2.5 3.1,2.5, height 1.75
SOIC127P600X175-8N [mm]
  rect 1.55x0.6 smd: 1(-2.7,1.905) 2(-2.7,0.635) 3(-2.7,-0.635) 4(-2.7,-1.905) 5(2.7,-1.905) 6(2.7,-0.635) 7(2.7,0.635) 8(2.7,1.905)
  silkscreen extent -2.52,-2.5 1.55,2.88, body extent -3.1,-2.5 3.1,2.5, height 1.75
SOIC-OA8_M [mm] "SOIC, 8-Leads, Body 4.9x3.9mm, Pitch 1.27mm, IPC Low Density"
  oval 2.5x0.7 smd: 1(-2.45,1.905) 2(-2.45,0.635) 3(-2.45,-0.635) 4(-2.45,-1.905) 5(2.45,-1.905) 6(2.45,-0.635) 7(2.45,0.635) 8(2.45,1.905)
  silkscreen extent -2.57,-2.5 0.8,2.93, body extent -2,-2.5 2,2.5, height 1.75
SON50P160X65_HS-7N [mm] "SON, 6-Leads, Body 1,60x1,60mm, Pitch 0,50mm, Thermal Pad 1,18x0,28mm, IPC Medium Density"
  rect 0.63x0.3 smd: 1(-0.76,0.5) 2(-0.76,0) 3(-0.76,-0.5) 4(0.76,-0.5) 5(0.76,0) 6(0.76,0.5)
  rect 0.45x1.3 smd: 7(0,0)
  silkscreen extent -1.27,-0.98 0.85,1.02, body extent -0.85,-0.85 0.85,0.85, height 0.65
SON50P300X300X80-9N-R175X248 [mm] "SON, (DFN) 0.50mm,pitch; 8 pin,3.00mm W X 3.00mm L X 0.80mm H body (w/thermal tab 1.75 X2.48mm), IPC Medium Density"
  rect 0.8x0.3 smd: 1(-1.5,0.75) 2(-1.5,0.25) 3(-1.5,-0.25) 4(-1.5,-0.75) 5(1.5,-0.75) 6(1.5,-0.25) 7(1.5,0.25) 8(1.5,0.75)
  rect 1.75x2.45 smd: 9(0,0)
  silkscreen extent -2.52,-1.5 1.5,1.5, body extent -1.55,-1.55 1.55,1.55, height 0.8
SOP65P640X120-16N [mm]
  rect 1.45x0.45 smd: 1(-2.95,2.275) 2(-2.95,1.625) 3(-2.95,0.975) 4(-2.95,0.325) 5(-2.95,-0.325) 6(-2.95,-0.975) 7(-2.95,-1.625) 8(-2.95,-2.275) 9(2.95,-2.275) 10(2.95,-1.625) 11(2.95,-0.975) 12(2.95,-0.325) 13(2.95,0.325) 14(2.95,0.975) 15(2.95,1.625) 16(2.95,2.275)
  silkscreen extent -3.08,-2.55 1.85,3.17, body extent -3.12,-2.55 3.12,2.55, height 1.2
SOT95P230X110-3N [mm] "SOT23, 3 pin, Pitch 0.95mm - 1.3mm W X 2.9mm L X 1.1mm H, IPC Medium Density"
  rect 1x0.6 smd: 1(-1.15,0.95) 2(-1.15,-0.95) 3(1.15,0)
  silkscreen extent -1.53,-1.45 0.33,1.87, body extent -1.08,-1.5 1.25,1.5, height 1.1
SOT95P240X110-3N [mm]
  rect 1.05x0.65 smd: 1(-1.15,0.95) 2(-1.15,-0.95) 3(1.15,0)
  silkscreen extent -2.29,-1.45 0.3,1.45, body extent -1.25,-1.5 1.25,1.5, height 1.1
SOT95P270X145-5N [mm] "SOT, 0.95mm Pitch; 5 Pin,1.55mm W X 2.90mm L X 1.45mm H body, IPC Medium Density"
  rect 1.25x0.6 smd: 1(-1.35,0.95) 2(-1.35,0) 3(-1.35,-0.95) 4(1.35,-0.95) 5(1.35,0.95)
  silkscreen extent -1.83,-1.45 0.4,1.87, body extent -1.35,-1.45 1.35,1.45, height 1.45
SOT95P280X145-5N [mm] "SOT, 0.95mm pitch; 5 pin, 1.60mm W X 2.90mm L X 1.45mm H body, IPC Medium Density"
  rect 1.1x0.6 smd: 1(-1.3,0.95) 2(-1.3,0) 3(-1.3,-0.95) 4(1.3,-0.95) 5(1.3,0.95)
  silkscreen extent -1.72,-1.45 0.43,1.87, body extent -1.4,-1.5 1.4,1.5, height 1.45
SOT95P280X145-6N [mm] "SOT23, 6-Leads, Body 1.6x3.0mm, Pitch 0.95mm, IPC Medium Density"
  rect 1.05x0.6 smd: 1(-1.35,0.95) 2(-1.35,0) 3(-1.35,-0.95) 4(1.35,-0.95) 5(1.35,0) 6(1.35,0.95)
  silkscreen extent -1.77,-1.55 0.45,1.92, body extent -1.4,-1.5 1.4,1.5, height 1.45
SOT190P230X110-4N [mm] "SOT143, SOT, 1.90mm Pitch; 4 Pin, 1.30mm W X 2.90mm L X 1.10mm H body, IPC Medium Density"
  rect 1x1 smd: 1(-1.15,0.75)
  rect 1x0.6 smd: 2(-1.15,-0.95) 3(1.15,-0.95) 4(1.15,0.95)
  silkscreen extent -1.52,-1.45 0.33,1.88, body extent -1.25,-1.5 1.25,1.5, height 1.1
SOT-23 [mil]
  rect 36x36 smd: 1(0,0) 2(75,0)
  rect 36x50 smd: 3(38,80)
  silkscreen extent -20,-5 95,85, body extent -21,-5 97,93, height 47
TEXAS_RGX0011A [mm] "TEXAS Case Style (R-VQFN-HR-N11), 0.50mm Pitch, 11-pin, 2.00mm W X 3.00mm L X 1.00mm H Body"
  oval 2.75x0.3 smd: 1(0,0.5) 2(0,0) 3(0,-0.5)
  oval 0.3x0.85 smd: 4(-0.75,-1.45) 5(-0.25,-1.45) 6(0.25,-1.45) 7(0.75,-1.45) 8(0.75,1.45) 9(0.25,1.45) 10(-0.25,1.45) 11(-0.75,1.45)
  silkscreen extent -2.07,0.38 -1.83,0.62, body extent -1,-1.5 1,1.5, height 1
THERMC1608X95N [mm] "PTC Thermistors, Chip; 1.6mm L X 0.8mm W X 0.95mm H, IPC Medium Density"
  rect 0.8x1 smd: 1(-0.85,0) 2(0.85,0)
  body extent -0.87,-0.47 0.88,0.48, height 0.95
TO127P991X239-6N-R585X701 [mm] "TO-252 DPAK TO, 1.27mm Pitch; 5 Pin, 10.3mm L X 8.781mm W X 2.39mm H body"
  rect 2x0.76 smd: 1(-4.35,2.54) 2(-4.35,1.27) 3(-4.35,0) 4(-4.35,-1.27) 5(-4.35,-2.54)
  rect 5.85x7.1 smd: 6(2.425,0)
  silkscreen extent -5.12,-3.25 -0.85,3.65, body extent -4.9,-3.25 4.9,3.25, height 2.24
TO228P972X240-3N-R540X510 [mm] "TO-252 DPAK TO, 2.28mm Pitch; 2 Pin, 9.725mm L X 6.50mm W X 2.40mm H body, IPC Medium Density"
  rect 2.1x1 smd: 1(-4.35,2.28) 2(-4.35,-2.28)
  rect 5.85x5.5 smd: 3(2.45,0)
  silkscreen extent -5.27,-3.25 -0.85,3.43, body extent -4.9,-3.3 4.82,3.3, height 2.4
TPS127 [mm] "1.27 x  1.27mm SMD Test Point Area"
  rect 1.27x1.27 smd paste-1.27: 1(0,0)
  silkscreen extent -0.94,-0.94 0.94,0.94
XFMR_TCM1-63AX+ [mil]
  rect 30x65 smd: 1(-50,62.5) 2(0,62.5) 3(50,62.5) 4(50,-62.5) 5(0,-62.5) 6(-50,-62.5)
  silkscreen extent -54,106 -46,114, body extent -75,-80 75,80, height 160
XTAL_EPSON_TSX-3225 [mm] "Crystal TSX-3225 Serie, Corner Concave; 4 pin, 2.50mm L X 3.2mm W X 0.6mm H"
  rect 1.15x1.4 smd: 1(-0.8,1.1) 2(-0.8,-1.1) 3(0.8,-1.1) 4(0.8,1.1)
  silkscreen extent -2.07,1.08 -1.83,1.33, body extent -1.25,-1.6 1.25,1.6, height 0.6

## Part data
B5A B5B B6A B6B B7A B7B B8A B8B B9A B9B B10A B10B B11A B11B B12A B12B B13A B13B B14A B14B B15A B15B B16A B16B B17A B17B: library part PLATED_HOLE2.4_PAD4.0, "Single Terminal Socket", Author="CERN DEM JMW", Component Type="Standard (No BOM)", ComponentHeight=0mm, CreateDate=10.10.2011, Family="Plated Hole", HelpURL=Undefined, LatestRevisionDate=10.10.2011, Mounted=No, PackageDescription="Plated Through Hole: Hole Dia.=2.4mm Pad Dia.=4.0mm", Part Description="Plated Through Hole: Hole Dia.=2.4mm Pad Dia.=4.0mm", Part Number=PLATED_HOLE2.4_PAD4.0, Pin Count=1, Sense=No, SMD=No, Socket=No, Status=None
C1A C1B: library part CC0402_10NF_16V_10%_X7R, "Non-polarised capacitor", Case=0402, MANUFACTURER=GENERIC, Manufacturer1 ComponentHeight=0.55mm, Manufacturer1 Example=PHYCOMP, Manufacturer1 Part Number=223878715636, Tolerance=±10%, Voltage=16V, Author="CERN DEM JLC", Component Type=Standard, CreateDate=2007-12-03, HelpURL=\\cern.ch\dfs\Applications\Altium\Datasheets\CC0402_X7R_PHYCOMP.pdf, LatestRevisionDate=2007-12-03, Manufacturer Part Number=CC0402_10NF_16V_10%_X7R, Mounted=Yes, Part Description="SMD Multilayer Chip Ceramic Capacitor", Part Number=CC0402_10NF_16V_10%_X7R, Pin Count=2, Sense=No, SMD=Yes, Socket=No, Status="Not Recommended", TC=X7R
C2A C2B C50A C50B: library part CC0603_NO-VALUE, "Non-polarised capacitor", Case=0603, Manufacturer1 ComponentHeight=0.9mm, Author="CERN DEM MR", Component Type=Standard, CreateDate=22.11.2016, HelpURL=Undefined, LatestRevisionDate=22.11.2016, MANUFACTURER=Undefined, Manufacturer Part Number=CC0603_NO-VALUE, Mounted=No, Part Description="Reserved Footprint For 0603(1608) Chip Ceramic Capacitor", Part Number=CC0603_NO-VALUE, Pin Count=2, Sense=No, SMD=Yes, Socket=No, Status=None
C3A C3B C44A C44B C52A C52B: library part CC0603_2.2NF_50V_5%_C0G, "Non-polarised capacitor", Case=0603, MANUFACTURER=GENERIC, Manufacturer1 ComponentHeight=0.9mm, Manufacturer1 Example=TDK, Manufacturer1 Part Number=C1608C0G1H222J080AA, Tolerance=±5%, Voltage=50V, Author="CERN DEM JMW", Component Type=Standard, CreateDate=23.06.2014, HelpURL=\\cern.ch\dfs\Applications\Altium\Datasheets\CC0603_C0G_TDK_C.pdf, LatestRevisionDate=23.06.2014, Manufacturer Part Number=CC0603_2.2NF_50V_5%_C0G, Mounted=Yes, Part Description="SMD Multilayer Chip Ceramic Capacitor", Part Number=CC0603_2.2NF_50V_5%_C0G, Pin Count=2, Sense=No, SMD=Yes, Socket=No, Status=Preferred, TC=C0G/NP0
C4A C4B C9A C9B: library part CC0603_4.7UF_16V_10%_X5R, "Non-polarised capacitor", Case=0603, MANUFACTURER=GENERIC, Manufacturer1 ComponentHeight=0.95mm, Manufacturer1 Example="TAIYO YUDEN", Manufacturer1 Part Number=EMK107ABJ475KA-T, Tolerance=±10%, Voltage=16V, Author="CERN DEM JLC", Component Type=Standard, CreateDate=16.12.2013, HelpURL=\\cern.ch\dfs\Applications\Altium\Datasheets\CC0603_X7R_TAIYO-YUDEN_HIGH-VALUE.pdf, LatestRevisionDate=16.09.2014, Manufacturer Part Number=CC0603_4.7UF_16V_10%_X5R, Mounted=Yes, Part Description="SMD Multilayer Chip Ceramic Capacitor", Part Number=CC0603_4.7UF_16V_10%_X5R, Pin Count=2, Sense=No, SMD=Yes, Socket=No, Status=None, TC=X5R
C5A C5B C8A C8B C39A C39B C40A C40B: library part CC0603_100NF_50V_10%_X7R, "Non-polarised capacitor", Case=0603, MANUFACTURER=GENERIC, Manufacturer1 ComponentHeight=0.87mm, Manufacturer1 Example=PHYCOMP, Manufacturer1 Part Number=223858615649, Tolerance=±10%, Voltage=50V, Author="CERN DEM JLC", Component Type=Standard, CreateDate=03.12.2007, HelpURL=\\cern.ch\dfs\Applications\Altium\Datasheets\CC0603_X7R_PHYCOMP.pdf, LatestRevisionDate=03.12.2007, Manufacturer Part Number=CC0603_100NF_50V_10%_X7R, Mounted=Yes, Part Description="SMD Multilayer Chip Ceramic Capacitor", Part Number=CC0603_100NF_50V_10%_X7R, Pin Count=2, Sense=No, SMD=Yes, Socket=No, Status=Preferred, TC=X7R
C6A C6B C7A C7B C11A C11B C12A C12B C13A C13B C15A C15B C16A C16B: library part CC0603_680PF_50V_5%_NP0, "Non-polarised capacitor", Case=0603, MANUFACTURER=GENERIC, Manufacturer1 ComponentHeight=0.87mm, Manufacturer1 Example=PHYCOMP, Manufacturer1 Part Number=223886715681, Tolerance=±5%, Voltage=50V, Author="CERN DEM JLC", Component Type=Standard, CreateDate=03.12.2007, HelpURL=\\cern.ch\dfs\Applications\Altium\Datasheets\CC0603_NP0_PHYCOMP.pdf, LatestRevisionDate=03.12.2007, Manufacturer Part Number=CC0603_680PF_50V_5%_NP0, Mounted=Yes, Part Description="SMD Multilayer Chip Ceramic Capacitor", Part Number=CC0603_680PF_50V_5%_NP0, Pin Count=2, Sense=No, SMD=Yes, Socket=No, Status=Preferred, TC=C0G/NP0
C10 C19A C19B C32 C34 C36 C56A C56B C57A C57B C58A C58B C61A C61B C62 C63 C64 C67 C77 C95 C109 C116 C245A C245B T_C22 T_C23 T_C24 T_C25: library part CC0402_100NF_16V_10%_X5R, "Non-polarised capacitor", Case=0402, MANUFACTURER=GENERIC, Manufacturer1 ComponentHeight=0.55mm, Manufacturer1 Example=MURATA, Manufacturer1 Part Number=GRM155R61C104KA88D, Tolerance=±10%, Voltage=16V, Author="CERN DEM JLC", Component Type=Standard, HelpURL=\\cern.ch\dfs\Applications\Altium\Datasheets\CC0402_X5R_MURATA_GRM.pdf, Manufacturer Part Number=CC0402_100NF_16V_10%_X5R, Mounted=Yes, Part Description="SMD Multilayer Chip Ceramic Capacitor", Part Number=CC0402_100NF_16V_10%_X5R, Pin Count=2, SMD=Yes, Socket=No, Status=None, TC=X5R
  C10 C19A C19B C32 C34 C36 C56A C56B C57A C57B C58A C58B C61A C61B C62 C63 C64 C67 C77 C95 C109 C116 C245A C245B: CreateDate=10.12.2013, LatestRevisionDate=10.12.2013, Sense=No
  T_C22 T_C23 T_C24 T_C25: CreateDate=2013-12-10, LatestRevisionDate=2013-12-10, Table="Capacitors SMD"
C14A C14B C43A C43B C46A C46B: library part CC0603_330PF_50V_1%_NP0, "Non-polarised capacitor", Case=0603, MANUFACTURER=GENERIC, Manufacturer1 ComponentHeight=0.87mm, Manufacturer1 Example=PHYCOMP, Manufacturer1 Part Number=223886718331, Tolerance=±1%, Voltage=50V, Author="CERN DEM MR", Component Type=Standard, CreateDate=06.09.2017, HelpURL=\\cern.ch\dfs\Applications\Altium\Datasheets\CC0603_NP0_PHYCOMP.pdf, LatestRevisionDate=06.09.2017, Manufacturer Part Number=CC0603_330PF_50V_1%_NP0, Mounted=Yes, Part Description="SMD Multilayer Chip Ceramic Capacitor", Part Number=CC0603_330PF_50V_1%_NP0, Pin Count=2, Sense=No, SMD=Yes, Socket=No, Status=None, TC=C0G/NP0
C17A C17B C51A C51B C59A C59B: library part CC0402_100PF_50V_5%_C0G, "Non-polarised capacitor", Case=0402, MANUFACTURER=GENERIC, Manufacturer1 ComponentHeight=0.55mm, Manufacturer1 Example=KEMET, Manufacturer1 Part Number=C0402C101J5GACTU, Tolerance=±5%, Voltage=50V, Author="CERN DEM JLC", Component Type=Standard, HelpURL="\\cern.ch\dfs\Applications\Altium\Datasheets\CC0805_C0G_KEMET_(Commercial Grade).pdf", Manufacturer Part Number=CC0402_100PF_50V_5%_C0G, Mounted=Yes, Part Description="SMD Multilayer Chip Ceramic Capacitor", Part Number=CC0402_100PF_50V_5%_C0G, Pin Count=2, Sense=No, SMD=Yes, Socket=No, Status=Preferred, TC=C0G/NP0
  C17A C17B: CreateDate=2007-12-03, LatestRevisionDate=2015-04-22
  C51A C51B C59A C59B: CreateDate=03.12.2007, LatestRevisionDate=22.04.2015